# Altium PCB UNIT-TYPE-A.PcbDoc
Units mm, origin at the board's own origin, x right, y up, seen from the top; angles counter-clockwise.
Board outline 20.6 x 20.6 mm, 2 copper layers (Top Layer, Bottom Layer), stack 0.98 mm thick; 1 components, 5 nets, 4 pads, 1 vias.
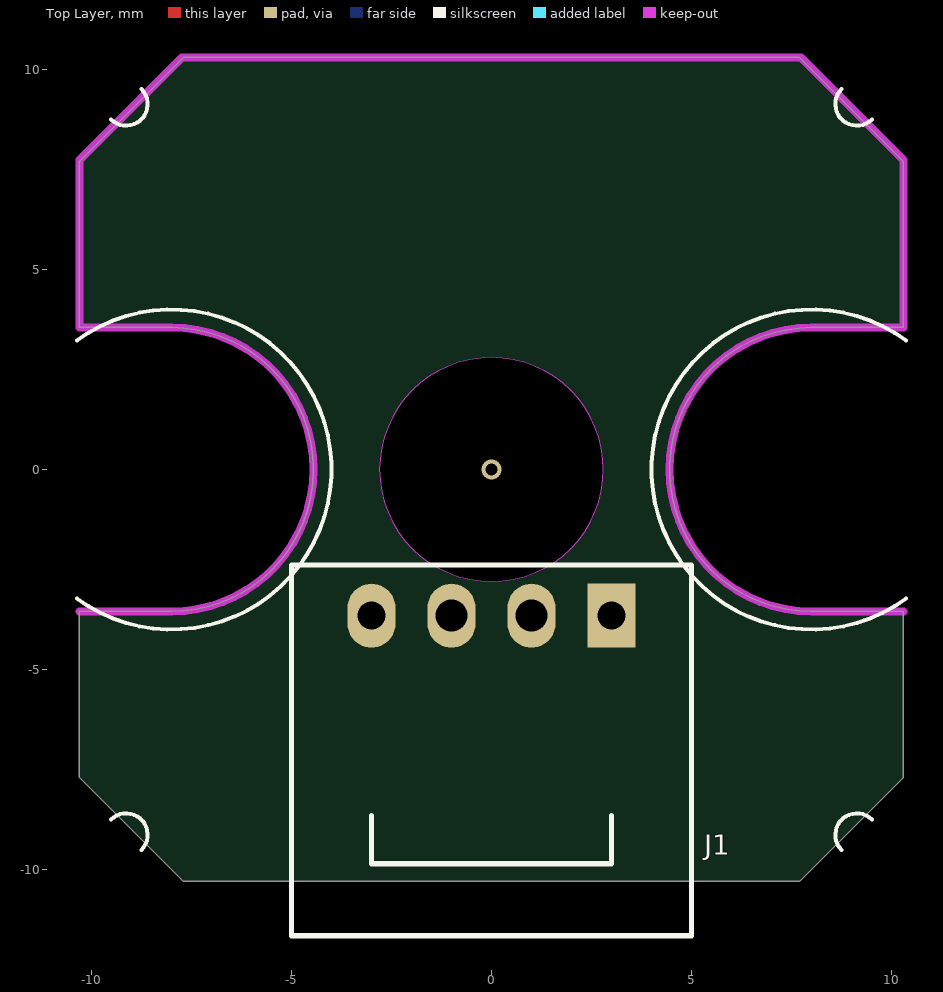
[diagram p0: Top Layer view]
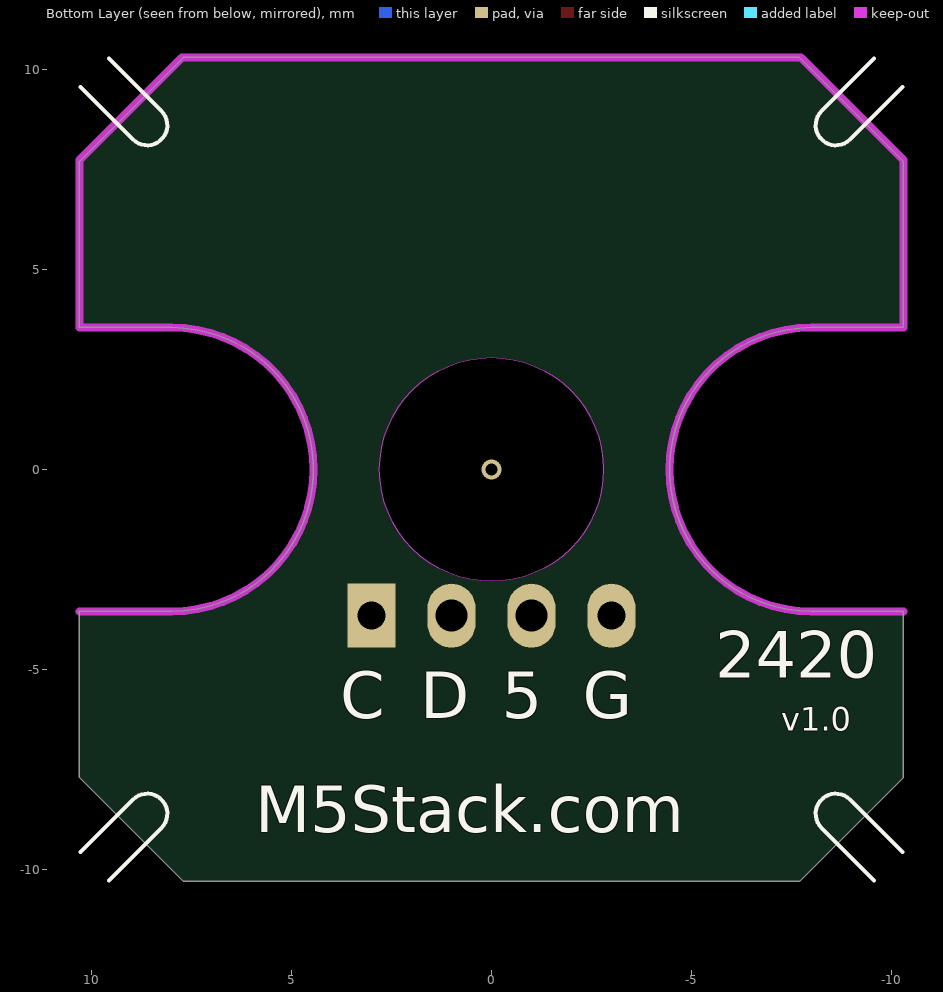
[diagram p1: Bottom Layer view, seen from below]

## Layer stack, top to bottom
Top Solder: solder mask 0.0102, Solder Resist, Dk 3.5
Top Layer: signal copper 0.0356
Dielectric 1: dielectric 0.9086, FR-4, Dk 4.8
Bottom Layer: signal copper 0.0356
Bottom Solder: solder mask 0.0102, Solder Resist, Dk 3.5

## Board outline
-10.3,-7.7 -7.7,-10.3 7.7,-10.3 10.3,-7.7 10.3,-3.55 8,-3.55 cw(c8,0) 8,3.55 10.3,3.55 10.3,7.7 7.7,10.3 -7.7,10.3 -10.3,7.7 -10.3,3.55 -8,3.55 cw(c-8,0) -8,-3.55 -10.3,-3.55
cut-out: -2.8,0 ccw(c0,0) 0,-2.8 ccw(c0,0) 2.8,0 ccw(c0,0) 0,2.8 ccw(c0,0)

## Design rules (kind name [scope] priority, off if disabled: settings)
Clearance [All] p1: gap=0.254 ignorepadtopadclearanceinfootprint=FALSE except(0: Arc-Hole Track-Hole SMDPad-Hole THPad-Hole Via-Hole Fill-Hole Poly-Hole Region-Hole Text-Hole)
PolygonConnect [All] p1: thpad.connectstyle=Relief thpad.reliefconductorwidth=0.254 thpad.reliefentries=4 thpad.polygonreliefangle="90 Angle" thpad.airgapwidth=0.254 smdpad.connectstyle=Relief smdpad.reliefconductorwidth=0.254 smdpad.reliefentries=4 smdpad.polygonreliefangle="90 Angle" smdpad.airgapwidth=0.254 via.connectstyle=Direct via.reliefconductorwidth=0.254 via.reliefentries=4 via.polygonreliefangle="90 Angle" via.airgapwidth=0.254
RoutingVias [All] p1: holewidth=0.3 width=0.6 viastyle="Through Hole" minholewidth=0.3 minwidth=0.6 maxholewidth=0.3 maxwidth=0.6
SolderMaskExpansion [All] p1: expansion=0.102 istentingtop=FALSE
Width [InNet('No Net')] p1: maxlimit=0.254 minlimit=0.254 preferedwidth=0.254
30 further rules are at their usual default settings.

## Components (designator, comment, footprint, x,y, rotation, side; value= is the part's Value field where it differs from the comment)
J1 "HY-2.0_IIC" Grove 0,-9.856 r270 top

## Footprints (in the part's own frame and the unit in brackets; to place one, negate y for a bottom-side part, rotate by r counter-clockwise, add the part's x,y. Pads: shape width x height; smd on the part's side, far side on the other; paste and mask are expansions set on the pad)
Grove [mm]
  rect 1.6x1.2 hole 0.7: 1(-6.2,3)
  oval 1.6x1.2 hole 0.8: 2(-6.2,1) 3(-6.2,-1)
  oval 1.6x1.2 hole 0.7: 4(-6.2,-3)
  silkscreen extent -7.47,-5 1.8,5

## Part data
J1: library part Grove_IIC

## Via types
v1: diameter 0.5, hole 0.3, Top Layer to Bottom Layer, tented both sides, 1 vias

## Nets (pads, with @x,y where several pads share a name; then routed paths per layer and width w, separated by ;. In a path a pad name is that pad's centre, name@x,y a point inside that pad or via, vN(x,y) a via of type N, cw(c..) or ccw(c..) an arc to the next point about the centre after c; other vN are vias at no path point)
+3.3V: 
+5V: J1.3
CLK: J1.1
DAT: J1.2
GND: J1.4
copper on no net:
  other v1: 0,0

## Keep-outs
Keep-Out Layer:
  lines w0.2: -10.3,-3.55 -8,-3.55 ccw(c-8,0) -8,3.55 -10.3,3.55 -10.3,7.734 -7.734,10.3 7.734,10.3 10.3,7.734 10.3,3.55 8,3.55 ccw(c8,0) 8,-3.55 10.3,-3.55

## Silkscreen, mask and mechanical layers (free items; w line width, h text height)
Top Overlay:
  lines w0.1: -10.367,-3.224 ccw(c-8,0) -10.367,3.224 ; -9.51,-8.753 cw(c-9.131,-9.131) -8.753,-9.51 ; -9.51,8.753 ccw(c-9.131,9.131) -8.753,9.51 ; 8.753,-9.51 cw(c9.131,-9.131) 9.51,-8.753 ; 8.753,9.51 ccw(c9.131,9.131) 9.51,8.753 ; 10.367,-3.224 cw(c8,0) 10.367,3.224
Bottom Overlay:
  lines w0.1: -10.273,-9.566 -8.958,-8.251 cw(c-8.605,-8.605) -8.251,-8.958 -9.566,-10.273 ; -10.273,9.566 -8.958,8.251 ccw(c-8.605,8.605) -8.251,8.958 -9.566,10.273 ; 9.566,-10.273 8.251,-8.958 cw(c8.605,-8.605) 8.958,-8.251 10.273,-9.566 ; 9.566,10.273 8.251,8.958 ccw(c8.605,8.605) 8.958,8.251 10.273,9.566
  text "2420" at -5.588,-5.588 h2
  text "G" at -2.286,-6.604 h2
  text "5" at -0.254,-6.604 h2
  text "D" at 1.778,-6.604 h2
  text "C" at 3.778,-6.604 h2
  text "v1.0" at -7.239,-6.731 h1
  text "M5Stack.com" at 5.905,-9.462 h2
Mechanical 1:
  circle w0.2: c0,0 r2.8
  lines w0.127: -10.3,-7.7 -7.7,-10.3 7.7,-10.3 10.3,-7.7 10.3,-3.55 8,-3.55 cw(c8,0) 8,3.55 10.3,3.55 10.3,7.7 7.7,10.3 -7.7,10.3 -10.3,7.7 -10.3,3.55 -8,3.55 cw(c-8,0) -8,-3.55 -10.3,-3.55 -10.3,-7.7